# Altium PCB mainPCB.PcbDoc
Units mil, origin at the board's own origin, x right, y up, seen from the top; angles counter-clockwise.
Board outline 1000 x 450 mil, 4 copper layers (Top Layer, GND, 3V3, Bottom Layer), stack 23.756 mil thick; 23 components, 19 nets, 112 pads, 35 vias.
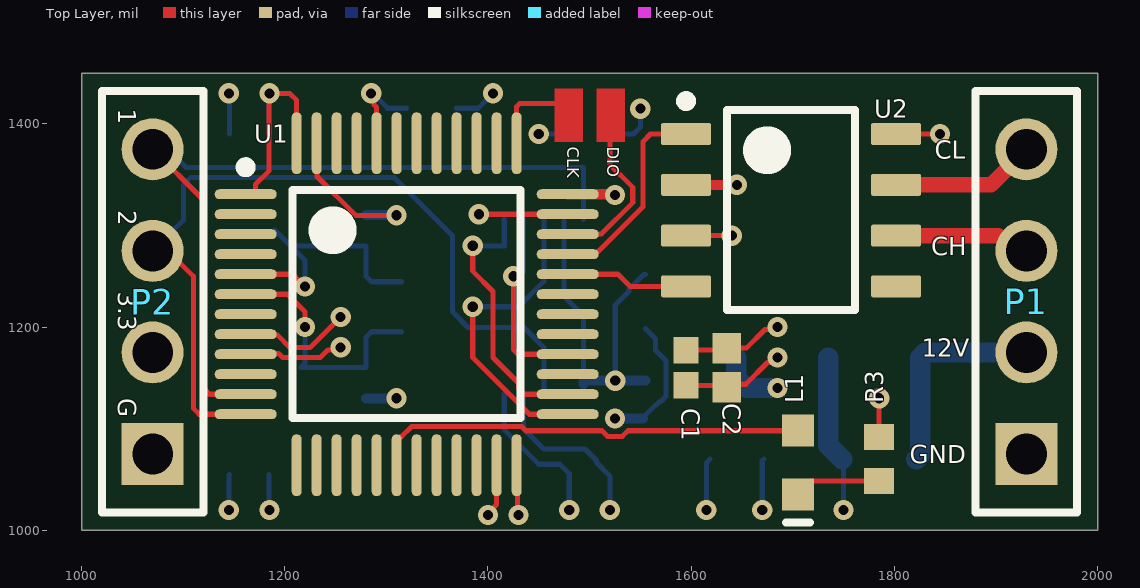
[diagram p0: Top Layer view]
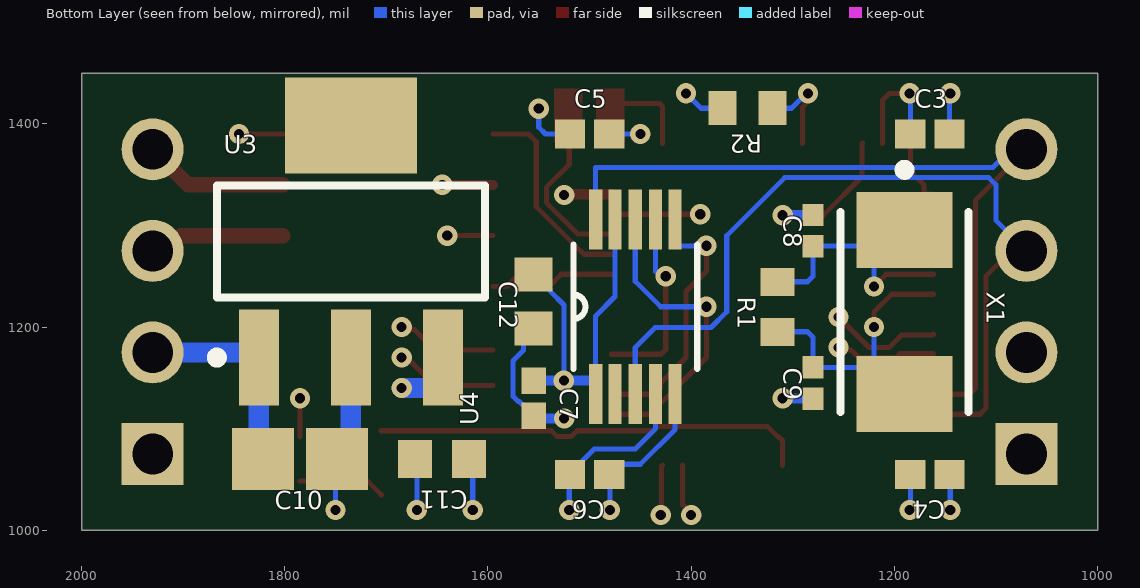
[diagram p1: Bottom Layer view, seen from below]
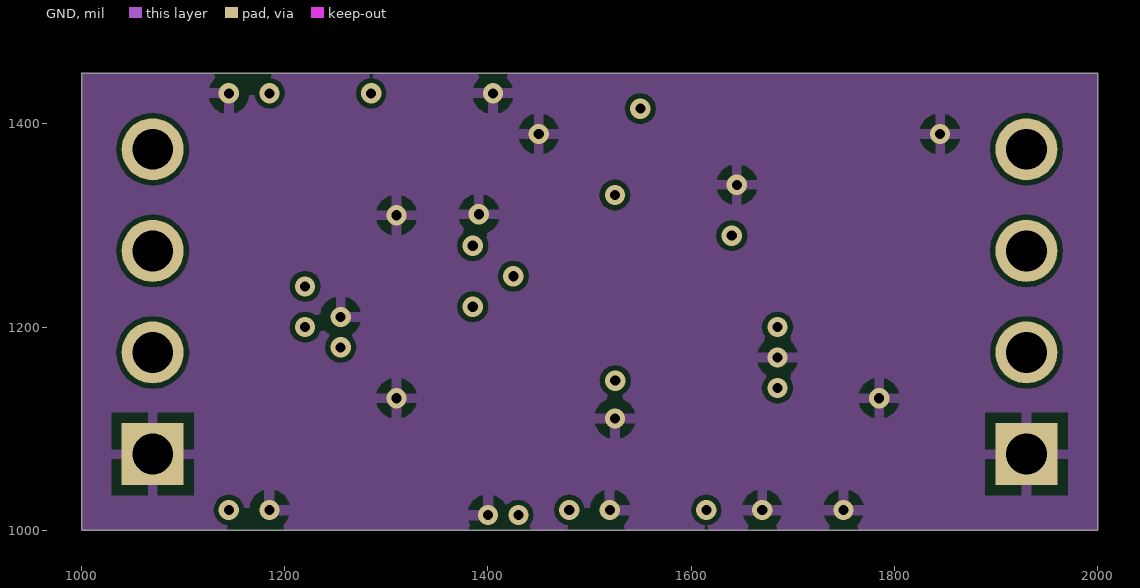
[diagram p2: GND]
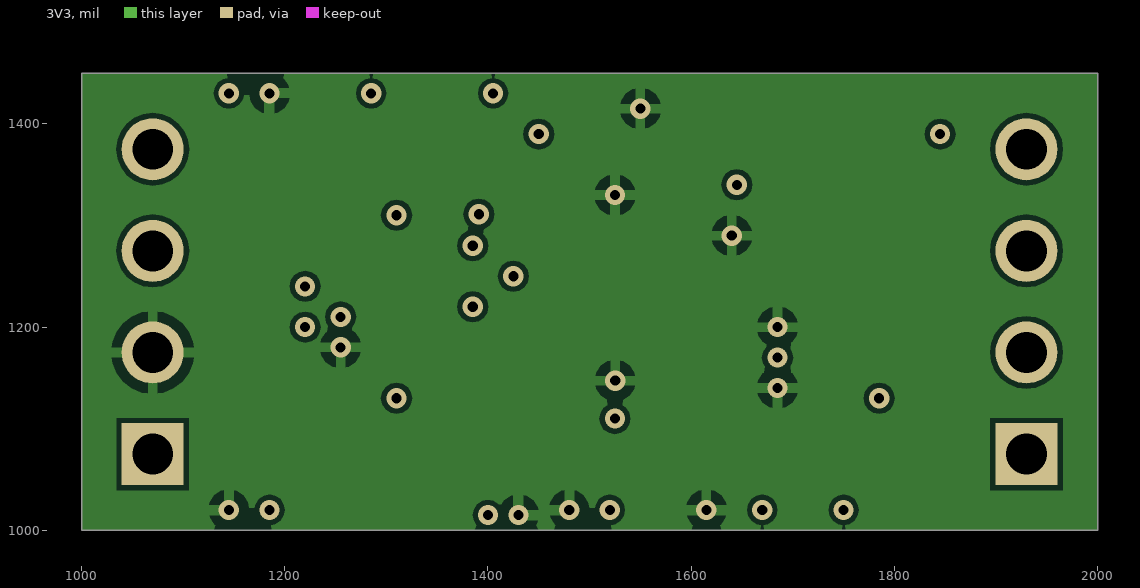
[diagram p3: 3V3]
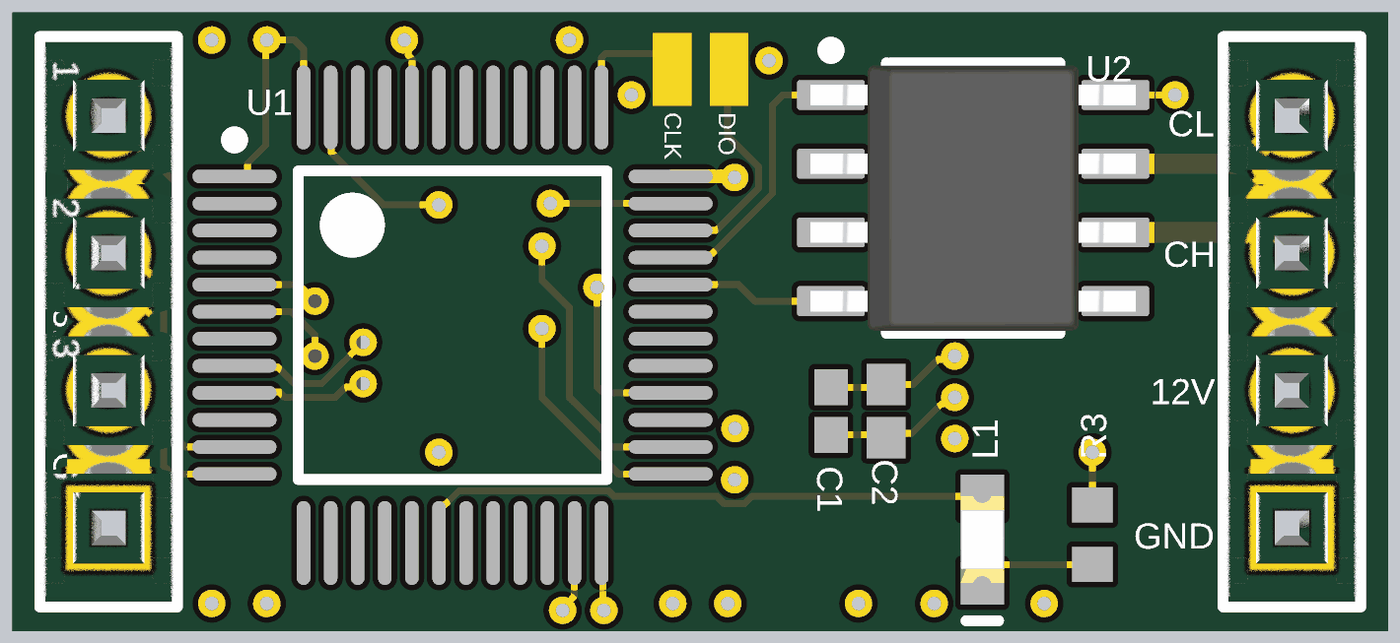
[diagram p4: 3D render of the assembled board from above, using the file's embedded part models]

## Layer stack, top to bottom
Top Solder: solder mask 0.4, Solder Resist, Dk 3.5
Top Layer: signal copper 1.4
Dielectric 2: prepreg 2.8, PP-006, Dk 4.1
GND: signal copper 1.3778
Dielectric 1: dielectric 12.6, FR-4, Dk 4.8
3V3: signal copper 1.3778
Dielectric 3: prepreg 2.8, PP-006, Dk 4.1
Bottom Layer: signal copper 1.4
Bottom Solder: solder mask 0.4, Solder Resist, Dk 3.5

## Board outline
1000,1000 2000,1000 2000,1450 1000,1450

## Design rules (kind name [scope] priority, off if disabled: settings)
Clearance [All] p1: gap=5 ignorepadtopadclearanceinfootprint=FALSE except(0: Arc-Hole Track-Hole SMDPad-Hole THPad-Hole Via-Hole Fill-Hole Poly-Hole Region-Hole Text-Hole)
DiffPairsRouting [All] p1: maxlimit=10 minlimit=4 mostfreqgap=10 toplayer_prefgap=5 toplayer_minwidth=10 toplayer_maxwidth=15 toplayer_prefwidth=15 midlayer1_mingap=10 midlayer1_minwidth=15 midlayer1_maxwidth=15 midlayer1_prefwidth=15 midlayer2_mingap=10 midlayer2_minwidth=15 midlayer2_maxwidth=15 midlayer2_prefwidth=15 bottomlayer_prefgap=5 bottomlayer_minwidth=10 bottomlayer_maxwidth=15 bottomlayer_prefwidth=15 maxuncoupledlength=500
PolygonConnect [All] p1: connectstyle=Relief reliefconductorwidth=10 reliefentries=4 polygonreliefangle="90 Angle" airgapwidth=10
RoutingVias [All] p1: holewidth=10 width=20 viastyle="Through Hole" minholewidth=8 minwidth=8 maxholewidth=50 maxwidth=50
SolderMaskExpansion [All] p1: expansion=4
Width [All] p1: maxlimit=200 minlimit=4 preferedwidth=10 midlayer1_maxwidth=10 midlayer2_maxwidth=10 minimp=50.000000 maximp=50.000000 favimp=50.000000
29 further rules are at their usual default settings.

## Classes and differential pairs
differential pair CAN: +CAN_P -CAN_N

## Components (designator, comment, footprint, x,y, rotation, side; value= is the part's Value field where it differs from the comment)
C1 "GRM155R61A105KE15D" CAPC1005X55X25NL05T10 1595,1160 r270 top
C2 "GRM155R71C104KA88D" CAPC1005X55X25ML05T10 1635,1160 r270 top
C3 "GRM155R71C104KA88D" CAPC1005X55X25ML05T10 1165,1390 r180 bottom
C4 "GRM155R71C104KA88D" CAPC1005X55X25ML05T10 1165,1055 r0 bottom
C5 "GRM155R71C104KA88D" CAPC1005X55X25ML05T10 1500,1390 r180 bottom
C6 "GRM155R71C104KA88D" CAPC1005X55X25ML05T10 1500,1055 r0 bottom
C7 "GRM155R61A105KE15D" CAPC1005X55X25NL05T10 1555,1130 r270 bottom
C8 "GJM1555C1H200FB01D" CAPC1005X55X25LL05T10 1280,1295 r270 bottom
C9 "GJM1555C1H200FB01D" CAPC1005X55X25LL05T10 1280,1145 r90 bottom
C10 "08055C104KAT2A." CAPC2013X127X50ML20T25 1785,1070 r180 bottom
C11 "GRM188R60J106ME47D" CAPC1608X90X35NL10T15 1645,1070 r0 bottom
C12 "GRM188R60J106ME47D" CAPC1608X90X35NL10T15 1555,1225 r270 bottom
L1 "150060BS75000" 0603_A 1705,1066.5 r90 top
P1 "TSW-104-08-G-S" SMTC-TSW-104-08-X-S 1930,1075 r90 top
P2 "TSW-104-08-G-S" SMTC-TSW-104-08-X-S 1070,1075 r90 top
R1 "ERJ-3EKF1004V" RESC1608X55X30LL15T15 1315,1220 r270 bottom
R2 "ERJ-3EKF1002V" RESC1608X55X30LL15T15 1344.61,1415.39 r0 bottom
R3 "200R 1% 0402(1005)" RESC0402(1005)_M 1785,1070 r90 top value="200.00 Ohm"
U1 "STM32F103C8T6" STM-LQFP48_L 1320,1222.48 r0 top
U2 "SN65HVD230DR" D0008A_L 1698.35,1315 r0 top
U3 "LM2936MPX-3.3" MP04A_N 1735,1284.17 r90 bottom
U4 "AD5162BRMZ10" *SOP50P490X110-10N 1455,1220 r90 bottom
X1 "ABM3-8.000MHZ-D2Y-T" ABRA-ABM3-2_V 1190,1215 r270 bottom

## Footprints (in the part's own frame and the unit in brackets; to place one, negate y for a bottom-side part, rotate by r counter-clockwise, add the part's x,y. Pads: shape width x height; smd on the part's side, far side on the other; paste and mask are expansions set on the pad)
0603_A [mm] "Chip LED, 2-Leads, Body 1.6x0.8mm, IPC Medium Density"
  rect 0.8x0.8 smd: 1(-0.8,0) 2(0.8,0)
  silkscreen extent -1.5,-0.3 -1.5,0.3, body extent -0.8,-0.4 0.8,0.4, height 0.7
*SOP50P490X110-10N [mil]
  rect 59x13 smd: 1(-86,39) 2(-86,20) 3(-86,0) 4(-86,-20) 5(-86,-39) 6(86,-39) 7(86,-20) 8(86,0) 9(86,20) 10(86,39)
  silkscreen extent -61,-61 61,61
ABRA-ABM3-2_V [mm] "SMD, 2-Leads, Body 5x3.2mm, Pitch 4.1mm"
  rect 1.9x2.4 smd: 1(-2.05,0) 2(2.05,0)
  silkscreen extent -3.67,-1.6 2.5,1.6, body extent -2.5,-1.6 2.5,1.6, height 1.3
CAPC1005X55X25LL05T10 [mm] "Chip Capacitor, 2-Leads, Body 1.00x0.50mm, IPC High Density"
  rect 0.56x0.52 smd: 1(-0.39,0) 2(0.39,0)
  body extent -0.53,-0.28 0.53,0.28, height 0.55
CAPC1005X55X25ML05T10 [mm] "Chip Capacitor, 2-Leads, Body 1.00x0.50mm, IPC Low Density"
  rect 0.76x0.72 smd: 1(-0.49,0) 2(0.49,0)
  body extent -0.53,-0.28 0.53,0.27, height 0.55
CAPC1005X55X25NL05T10 [mm] "Chip Capacitor, 2-Leads, Body 1.00x0.50mm, IPC Medium Density"
  rect 0.66x0.62 smd: 1(-0.44,0) 2(0.44,0)
  body extent -0.53,-0.28 0.53,0.27, height 0.55
CAPC1608X90X35NL10T15 [mm] "Chip Capacitor, 2-Leads, Body 1.60x0.80mm, IPC Medium Density"
  rect 0.85x0.95 smd: 1(-0.675,0) 2(0.675,0)
  body extent -0.85,-0.45 0.85,0.45, height 0.9
CAPC2013X127X50ML20T25 [mm] "Chip Capacitor, 2-Leads, Body 2.01x1.25mm, IPC Low Density"
  rect 1.55x1.55 smd: 1(-0.925,0) 2(0.925,0)
  body extent -1.1,-0.72 1.11,0.72, height 1.27
D0008A_L [mm] "SOIC, 8-Leads, Body 5x4mm, Pitch 1.27mm, IPC High Density"
  rrect18% 1.25x0.55 smd: 1(-2.625,1.905) 2(-2.625,0.635) 3(-2.625,-0.635) 4(-2.625,-1.905) 5(2.625,-1.905) 6(2.625,-0.635) 7(2.625,0.635) 8(2.625,1.905)
  silkscreen extent -2.75,-2.5 1.6,2.85, body extent -3,-2.45 3,2.45, height 1.63
MP04A_N [mm] "SOT223, 4-Leads, Body 6.5x3.5mm, Pitch 2.3mm, Lead Span 7mm, IPC Medium Density"
  rect 2.4x1 smd: 1(-2.9,2.3) 2(-2.9,0) 3(-2.9,-2.3)
  rect 2.4x3.3 smd: 4(2.9,0)
  silkscreen extent -3.02,-3.35 1.4,3.48, body extent -1.86,-3.35 1.86,3.35, height 1.8
RESC0402(1005)_M [mm] "Chip Resistor, Body 1.0x0.5mm, IPC Low Density"
  rect 0.65x0.75 smd: 1(-0.55,0) 2(0.55,0)
  body extent -0.52,-0.28 0.53,0.28, height 0.4
RESC1608X55X30LL15T15 [mm] "Chip Resistor, 2-Leads, Body 1.60x0.80mm, IPC High Density"
  rect 0.7x0.85 smd: 1(-0.625,0) 2(0.625,0)
  body extent -0.87,-0.48 0.87,0.48, height 0.55
SMTC-TSW-104-08-X-S [mm] ".025 SQ Post Terminal Strip Assembly, 1x4 Pins, Vertical, 2.54mm Pitch, Male"
  rect 1.55x1.55 hole 1.02: 1(0,0)
  round 1.55 hole 1.02: 2(2.54,0) 3(5.08,0) 4(7.62,0)
  silkscreen extent -1.46,-1.27 9.08,1.27, body extent -1.27,-1.27 8.89,1.27, height 8.38
STM-LQFP48_L [mm] "QFP, 48-Leads, Body 7x7mm, Pitch 0.5mm, IPC High Density"
  oval 1.55x0.25 smd: 1(-4.025,2.75) 2(-4.025,2.25) 3(-4.025,1.75) 4(-4.025,1.25) 5(-4.025,0.75) 6(-4.025,0.25) 7(-4.025,-0.25) 8(-4.025,-0.75) 9(-4.025,-1.25) 10(-4.025,-1.75) 11(-4.025,-2.25) 12(-4.025,-2.75) 25(4.025,-2.75) 26(4.025,-2.25) 27(4.025,-1.75) 28(4.025,-1.25) 29(4.025,-0.75) 30(4.025,-0.25) 31(4.025,0.25) 32(4.025,0.75) 33(4.025,1.25) 34(4.025,1.75) 35(4.025,2.25) 36(4.025,2.75)
  oval 0.25x1.55 smd: 13(-2.75,-4.025) 14(-2.25,-4.025) 15(-1.75,-4.025) 16(-1.25,-4.025) 17(-0.75,-4.025) 18(-0.25,-4.025) 19(0.25,-4.025) 20(0.75,-4.025) 21(1.25,-4.025) 22(1.75,-4.025) 23(2.25,-4.025) 24(2.75,-4.025) 37(2.75,4.025) 38(2.25,4.025) 39(1.75,4.025) 40(1.25,4.025) 41(0.75,4.025) 42(0.25,4.025) 43(-0.25,4.025) 44(-0.75,4.025) 45(-1.25,4.025) 46(-1.75,4.025) 47(-2.25,4.025) 48(-2.75,4.025)
  silkscreen extent -4.15,-2.85 2.85,3.55, body extent -3.5,-3.5 3.5,3.5, height 1.6

## Part data
C1 C7: library part CMP-2008-04556-1, Manufacturer=Murata, Part Number=GRM155R61A105KE15D
C2 C3 C4 C5 C6: library part CMP-2100-03641-1, "Chip Capacitor, 0.1 uF, +/- 10%, 16 V, -55 to 125 degC, 0402 (1005 Metric), RoHS, Tape and Reel", Capacitance=100nF, Case/Package=0402, Case Code (Metric)=1005, Dielectric=X7R, Dielectric Material=Ceramic, Insulation Resistance=10GR, Manufacturer=Murata, Max Operating Temperature=125degC, Min Operating Temperature=-55degC, Package Description="2-Pin Surface Mount Device, Body 1 x 0.5 mm", Package Quantity=1, Tolerance=10%, Voltage=16V, Case Code (Imperial)=0402, Datasheet URL=http://psearch.en.murata.com/capacitor/product/GRM155R71C104KA88%23.pdf, Datasheet Version=42675.0, Depth=0.5mm, Height=0.5mm, Lead Free=LeadFree, Length=1mm, Manufacturer URL=http://www.murata.com/, Material=Ceramic, Mount=SurfaceMount, Number of Pins=2, Package Reference=0402, Packaging=TapeandReel, Radiation Hardening=No, REACH SVHC=NoSVHC, RoHSCompliant=true, Termination=SMD/SMT, Thickness=0.022inch, Voltage Rating=16V, Voltage Rating (DC)=16V, Width=0.5mm
C8 C9: library part CMP-2008-03775-1, Manufacturer=Murata, Part Number=GJM1555C1H200FB01D
C10: library part CMP-2007-04840-1, Manufacturer="AVX Interconnect / Elco", Part Number=08055C104KAT2A.
C11 C12: library part CMP-2006-02792-1, Manufacturer=Murata, Part Number=GRM188R60J106ME47D
L1: library part CMP-1426-00003-1, "SMD mono-color Chip LED, WL-SMCW, Blue", Color=Blue, Manufacturer="Wuerth Elektronik", ComponentLink1Description="Manufacturer URL", ComponentLink1URL=http://www.we-online.com, ComponentLink2Description=Datasheet, ComponentLink2URL=http://katalog.we-online.com/led/datasheet/150060BS75000.pdf, PackageReference=0603_A, PartNumber=150060BS75000
P1 P2: library part CMP-1024-00357-1, "0.025\" SQ Post Header, Through-hole, Vertical, -55 to 125 degC, 2.54 mm Pitch, 4-Pin, Male, RoHS", Manufacturer=Samtec, Temperature Range="-55 to 125 degC", ComponentLink1Description="Manufacturer URL", ComponentLink1URL=http://www.samtec.com, ComponentLink2Description=Datasheet, ComponentLink2URL=http://www.samtec.com/documents/webfiles/pdf/TSW_TH.PDF, ComponentLink3Description="Package Specification", ComponentLink3URL=http://www.samtec.com/documents/webfiles/cpdf/TSW-XXX-XX-XXX-X-XX-XXX-MKT.pdf, DatasheetVersion=F-214, Mounting Technology=Through-hole, Orientation=Vertical, PackageDescription=".025[0.64] SQ. Post Terminal Strip Assembly", PackageReference=TSW-104-08-X-S, PackageVersion="DM, 8/1988", PartNumber=TSW-104-08-G-S, Pitch="2.54 mm", RoHS=True
R1: library part CMP-2000-00183-1, Manufacturer=Panasonic, Part Number=ERJ-3EKF1004V
R2: library part CMP-2000-00181-1, Manufacturer=Panasonic, Part Number=ERJ-3EKF1002V
R3: library part CMP-1011-00429-1, "200R 0.063W 1% 0402 (1005 Metric)  SMD", Case-EIA=0402, Case-Metric=1005, Power="0.063 W", Tolerance="1 %", Technology=SMT
U1: library part CMP-0237-00215-3, "ARM Cortex-M3 32-bit MCU, 64 KB Flash, 20 KB Internal RAM, 37 I/Os, 48-pin LQFP, -40 to 85 degC, Tray", I/Os (High Current)=37, Operating Frequency(F) (Processor speed) (MHz)=72, Supply Voltage(Vcc) min (V)=2, A/D Converter="2x12-bit (10 Channel)", ComponentLink1Description="Manufacturer URL", ComponentLink1URL=http://www.st.com/web/en/home.html, ComponentLink2Description=Datasheet, ComponentLink2URL=http://www.st.com/st-web-ui/static/active/en/resource/technical/document/datasheet/CD00161566.pdf, ComponentLink3Description="Package Specification", ComponentLink3URL=http://www.st.com/st-web-ui/static/active/en/resource/technical/document/datasheet/DM00058181.pdf, Core="ARM Cortex-M3", DatasheetVersion="Rev. 16", FLASH Size (Prog) (kB)=64, Internal RAM Size (kB)=20, Mounting Technology="Surface Mount", PackageDescription="48-Pin Low Profile Quad Flat Package, 7 x 7 mm Body, 0.5 mm Pitch", PackageReference=LQFP48, PackageVersion="Rev. 6, 06/2013", Packing=Tray, PartNumber=STM32F103C8T6
U2: library part CMP-0315-00015-2, "3.3V CAN Transceiver with Standby Mode, 17 mA, -40 to 85 degC, 8-pin SOIC (D), Green (RoHS & no Sb/Br)", Drivers Per Package=1, Low Power Mode=Standby, Manufacturer="Texas Instruments", Rating=Catalog, Supply Voltage(s)(V)=3.3, Code_JEDEC=MS-012AA, ComponentLink1Description=Datasheet, ComponentLink1URL=http://www.ti.com/general/docs/lit/getliterature.tsp?genericPartNumber=SN65HVD230&fileType=pdf, DatasheetVersion=SLOS346K, Eco-Plan="Green (RoHS & no Sb/Br)", ICC(Max)(mA)=17, Isolated=No, Mounting Technology="Surface Mount", PackageDescription="8-Pin Plastic Small Outline Integrated Circuit, 4.9 x 3.9 mm, Pitch 1.27 mm Pitch", PackageReference=D0008A, PackageVersion="revM, Jun-2011", PartNumber=SN65HVD230DR, Receivers Per Package=1, SubFamily=CAN, Transient Pulse Protection(V)="-25 to 25"
U3: library part CMP-0062-01666-2, "Ultra-Low Quiescent Current LDO Voltage Regulator, 4-pin SOT-223", Manufacturer="National Semiconductor", PackageTopMarking=XYTT*KABA, PowerWise=N, Code_IPC=SOT223-4, Code_JEDEC=TO-261-AA, ComponentLink1Description="LM2936 Datasheet", ComponentLink1URL=http://www.national.com/ds/LM/LM2936.pdf, ComponentLink2Description="LM2936 Web Page", ComponentLink2URL=http://www.national.com/pf/LM/LM2936.html, ComponentLink3Description="MP04A Package Page", ComponentLink3URL=http://www.national.com/packaging/folders/mp04a.html, CompType="LDO IC", DatasheetVersion=Oct-2006, PackageDescription="Molded SOT-223, 6.50 x 3.56 x 1.6mm Body, 4 Lead, 2.3mm Pitch", PackageReference=MP04A, PackageVersion="revB, Apr-2003", PinCount=4, RevisionNote="Component URLs added", RoHS=N
U4: "Digital Potentiometer, Volatile, 10kohm, 256, Dual, Msop-10", Package="MSOP-10 Analog Devices", Availability=Unavailable, MF="Analog Devices", MP=AD5162BRMZ10, Price=None, SnapEDA_Link=https://www.snapeda.com/parts/AD5162BRMZ10/Analog%20Devices%20Inc./view-part/?ref=snap
X1: library part CMP-2000-05033-1, "Miniature Ceramic Crystal, 8 MHz, -40 to 85 degC, 2-Pin SMD, RoHS, Tape and Reel", Case Height=1.3mm, Case Length=5mm, Case Width=3.2mm, Frequency=8MHz, Frequency Stability=30PPM, Load Capacitance=18pF, Manufacturer=ABRACON, Operating Temperature Range=-40Cto+85C, Package / Case=5mmx3.2mm, Package Description="2-Pin Surface Mount Device, Body 5 x 3.2 mm", Package Reference=ABM3-2, Tolerance=20PPM, Brand=ABRACON, Datasheet URL=http://www.farnell.com/datasheets/1754353.pdf, Datasheet Version=Sep-13, Dimensions=3.2mmWx5mmLx1.3mmH, ESR=140Ohms, Factory Pack Quantity=1000, Manufacturer URL=http://www.abracon.com/, Mounting Style=SMD/SMT, Package URL=http://www.abracon.com/Support/PackageDrawing/Resonators/ABM3.PDF, Packaging=Reel, Product Category=Crystals, RoHS=Details, Series=ABM3, Termination Style=SMD/SMT, Type=MiniatureCeramicCrystal

## Via types
v1: diameter 20, hole 10, Top Layer to Bottom Layer, 34 vias
v2: diameter 20/20/20/20 (per signal layer), hole 10, Top Layer to Bottom Layer, 1 vias

## Nets (pads, with @x,y where several pads share a name; then routed paths per layer and width w, separated by ;. In a path a pad name is that pad's centre, name@x,y a point inside that pad or via, vN(x,y) a via of type N, cw(c..) or ccw(c..) an arc to the next point about the centre after c; other vN are vias at no path point)
3V3: C1.1 C2.1 C3.1 C4.1 C5.1 C6.1 C7.1 C11.1 C12.1 P2.2 U1.1 U1.9 U1.24 U1.36 U1.48 U2.3 U3.3 U4.1 U4.5 U4.9 | length 1286.1
  Top Layer w5: U1.9 1162.25,1173.98 1193.98,1173.98 1197.96,1170 1235,1170 1242.63,1177.63 1252.63,1177.63 v1(1255,1180) ; U1.1 1168.79,1330.75 1171.03,1332.98 1171.03,1340.24 1184.29,1353.5 1184.29,1429.29 v1(1185,1430) 1205,1430 1211.73,1423.27 U1.48 ; U1.24 1429.19,1063.09 1429.19,1015.81 v1(1430,1015) ; C1.1 1633.03,1177.32 C2.1 1654.29,1179.29 1672.63,1197.63 1682.63,1197.63 v1(1685,1200) ; U2.3 v1(1640,1290)
  Top Layer w10: U1.36 1524.25,1330.75 v1(1525,1330)
  Bottom Layer w5: v1(1145,1020) 1145,1054.29 C4.1 ; C3.1 1184.29,1429.29 v1(1185,1430) ; U4.5 1416,1099 1450,1065 1470.71,1065 1480,1055.71 v1@1480,1015 ; U4.9 1475,1230 1494,1211 U4.1@1494,1145.82 ; U4.1 U4.1@1494,1144 ; C5.1 1543.31,1390 1550,1396.69 v1(1550,1415) ; v1(1525.25,1147.32) 1525.25,1221.82 1538.8,1235.37 1538.8,1237.34 1553.03,1251.57 C12.1 ; v1(1615,1020) 1615,1066.57 C11.1
  Bottom Layer w10: U4.1@1494,1144 1494,1145.82 1495.5,1147.32 v1(1525.25,1147.32) C7.1
  Bottom Layer w20: U3.3 1644.45,1149.69 1654.13,1140 v1(1685,1140)
  other v1: 1480,1020
+12: C10.1 P1.2 U3.1 | length 208.2
  Bottom Layer w20: C10.1 1825.55,1074.13 U3.1 1830.55,1175 P1.2
A1: P2.4 U1.11 U4.10 | length 782.3
  Top Layer w5: P2.4 1120,1325 1120,1140 1126.1,1133.9 U1.11
  Bottom Layer w5: P2.4 1085.16,1375 1103.09,1357.07 1494,1357.07 U4.10
A2: P2.3 U1.12 U4.3 | length 828.8
  Top Layer w5: P2.3 1085,1275 1110,1250 1110,1120 1115.79,1114.21 U1.12
  Bottom Layer w5: P2.3 1100.16,1305.16 1100.16,1340.16 1107.07,1347.07 1307.93,1347.07 1365,1290 1365,1215 1380.43,1199.57 1435.43,1199.57 1455,1180 U4.3
CAN_N: P1.3 U2.6 | length 134.5
  Top Layer w15: U2.6 1902.55,1290 1917.55,1275 P1.3
CAN_P: P1.4 U2.7 | length 142.8
  Top Layer w15: U2.7 1895,1340 P1.4
CANRXD: U1.32 U2.4 | length 133.3
  Top Layer w5: U1.32 1527.99,1252.01 1540,1240 1572.89,1240 1572.89,1248.33 1581.22,1240 U2.4
CANTXD: U1.33 U2.1 | length 203.1
  Top Layer w5: U1.33 1505.37,1271.69 1507.79,1274.11 1508.26,1274.11 1552.5,1318.36 1552.5,1382.5 1560,1390 U2.1
GND: C1.2 C2.2 C3.2 C4.2 C5.2 C6.2 C7.2 C8.1 C9.1 C10.2 C11.2 C12.2 P1.1 P2.1 R2.2 R3.2 U1.8 U1.23 U1.35 U1.47 U2.2 U2.8 U3.2 U4.4 | length 1335.8
  Top Layer w5: U1.8 1162.46,1192.03 1192.97,1192.03 1205,1180 1225,1180 v1(1255,1210) ; U1.47 1231.81,1380.55 1231.81,1348.19 1270,1310 v1(1310,1310) ; v1(1391.06,1311.06) U1.35 ; v1(1400,1015) 1400,1016.85 1408.58,1025.43 U1.23 ; C1.2 1633.03,1142.68 C2.2 1638.04,1143.74 1653.74,1143.74 1675.13,1165.13 1676.07,1165.13 1680.94,1170 v1(1685,1170) ; R3.2 v1(1785,1130) ; U2.8 v1(1845,1390)
  Top Layer w10: U2.2 v1(1645,1340)
  Bottom Layer w5: v1(1145,1430) 1145.71,1429.29 C3.2 ; C4.2 1184.29,1020.71 v1(1185,1020) ; R2.2 1390.39,1415.39 v1(1405,1430) ; U4.4 1435,1100 1455,1080 1495.45,1080 1506.83,1068.62 1506.83,1066.67 1520,1053.5 v1(1520,1020) ; v2(1450,1390) C5.2 ; C7.2@1552.32,1110 1552.32,1110.79 1564.7,1123.17 1565.49,1123.17 1569.15,1126.83 1570.31,1126.83 1575.31,1131.83 1575.31,1166.77 1564.96,1177.12 1564.96,1188.46 C12.2 ; v1(1670,1020) 1670,1068.43 C11.2 ; C10.2 1750,1068.58 v1(1750,1020)
  Bottom Layer w10: C9.1 1309.65,1129.65 v1(1310,1130) ; C8.1 1309.65,1310.35 v1(1310,1310) ; v1(1525,1110) C7.2@1552.32,1110
  Bottom Layer w20: U3.2 1735,1083.58 C10.2
MOSI: U1.28 U4.7 | length 190.5
  Top Layer w5: v1(1425,1250) 1425,1177.93 1429.66,1173.27 U1.28
  Bottom Layer w5: v1(1425,1250) 1429.06,1250 1433.93,1254.87 1434.87,1254.87 1435,1255 U4.7
NetC8_2: C8.2 R1.1 U1.5 X1.1 | length 272.4
  Top Layer w5: U1.5 1207.99,1252.01 v1(1220,1240)
  Bottom Layer w5: X1.1 X1.1@1206.06,1279.65 ; v1(1220,1240) 1220,1265.71 X1.1@1206.06,1279.65 ; R1.1 1285.39,1244.61 1280,1250 C8.2 X1.1@1206.06,1279.65
NetC9_2: C9.2 R1.2 U1.6 X1.2 | length 252.7
  Top Layer w5: U1.6 1202.68,1232.32 1220,1215 v1(1220,1200)
  Bottom Layer w5: v1(1220,1200) 1220,1164.29 1216.06,1160.35 C9.2 1280,1190 1285.39,1195.39 R1.2
NetL1_1: L1.1 R3.1 | length 85.5
  Top Layer w5: L1.1 1718.35,1048.35 R3.1
NetL1_2: L1.2 U1.18 | length 431
  Top Layer w5: U1.18 1310.16,1088.3 1313.89,1092.03 1314.7,1092.03 1324.7,1102.03 1433.41,1102.03 1437.45,1097.99 1512.26,1097.99 1517.75,1092.5 1532.25,1092.5 1537.74,1097.99 L1.2
NetR2_1: R2.1 U1.44 | length 92.4
  Top Layer w5: v1(1285,1430) 1287.87,1427.13 1287.87,1418.85 1290.47,1416.25 U1.44
  Bottom Layer w5: v1(1285,1430) 1286.69,1430 1301.3,1415.39 R2.1
SCK: U1.26 U4.6 | length 266.6
  Top Layer w5: v1(1385,1280) 1385,1255 1405,1235 1405,1170 1430,1145 1430,1140 1436.1,1133.9 U1.26
  Bottom Layer w5: v1(1385,1280) 1416,1280 U4.6
SPISS: U1.25 U4.8 | length 307.9
  Top Layer w5: v1(1385,1220) 1385,1170 1440.79,1114.21 U1.25
  Bottom Layer w5: v1(1385,1220) 1430,1220 1455,1245 U4.8
SWCLK: U1.37 | length 89.1
  Top Layer w5: U1.37 1428.27,1417.07 1431.2,1420 1480,1420
SWDIO: U1.34 | length 148.7
  Top Layer w5: U1.34 1478.59,1291.5 1511.5,1291.5 1542.5,1322.5 1542.5,1337.5 1520,1360 1520,1385
pads on no net: U1.2 U1.3 U1.4 U1.7 U1.10 U1.13 U1.14 U1.15 U1.16 U1.17 U1.19 U1.20 U1.21 U1.22 U1.27 U1.29 U1.30 U1.31 U1.38 U1.39 U1.40 U1.41 U1.42 U1.43 U1.45 U1.46 U2.5 U3.4 U4.2

## Polygon pours and split planes (outlines as drawn)
no net on Top Layer "Top Layer-No Net 1" (solid, pour order 18): 1450,1445
no net on Top Layer "Top Layer-No Net" (solid, pour order 0): 1795,1185
GND on GND "GND-GND" (solid, pour order 8): 1000,1450 1000,1000 2000,1000 2000,1450
3V3 on 3V3 "3V3-3V3" (solid, pour order 10): 1000,1450 1000,1000 2000,1000 2000,1450

## Other copper
Top Layer:
  rectangle net SWCLK: 1465.53,1382.2 1493.66,1435
  rectangle net SWDIO: 1506.87,1382.2 1535,1435

## Silkscreen, mask and mechanical layers (free items; w line width, h text height)
Top Overlay:
  text "1" at 1030,1415 h30 r270
  text "CLK" at 1474.04,1377.41 h20 r270
  text "DIO" at 1513.38,1377.41 h20 r270
  text "CL" at 1839.74,1360 h30
  text "2" at 1030,1315 h30 r270
  text "CH" at 1836.5,1265 h30
  text "3.3" at 1030,1235 h30 r270
  text "12V" at 1827.14,1165 h30
  text "G" at 1030,1130 h30 r270
  text "GND" at 1815,1060 h30
Top Paste:
Top Solder:
  rectangle: 1465.53,1382.2 1493.66,1435
  rectangle: 1506.87,1382.2 1535,1435